# Altium PCB HW_ADHERENT_LANECTRL_R1.PcbDoc (part 1 of 2)
Units mm, origin at the board's own origin, x right, y up, seen from the top; angles counter-clockwise.
Board outline 504 x 60 mm, 4 copper layers (Top Layer, Int1 (GND), Int2 (PWR), Bottom Layer), stack 1.541 mm thick; 223 components, 129 nets, 646 pads, 0 vias.
Unrouted connection lines stored in the file: 353.
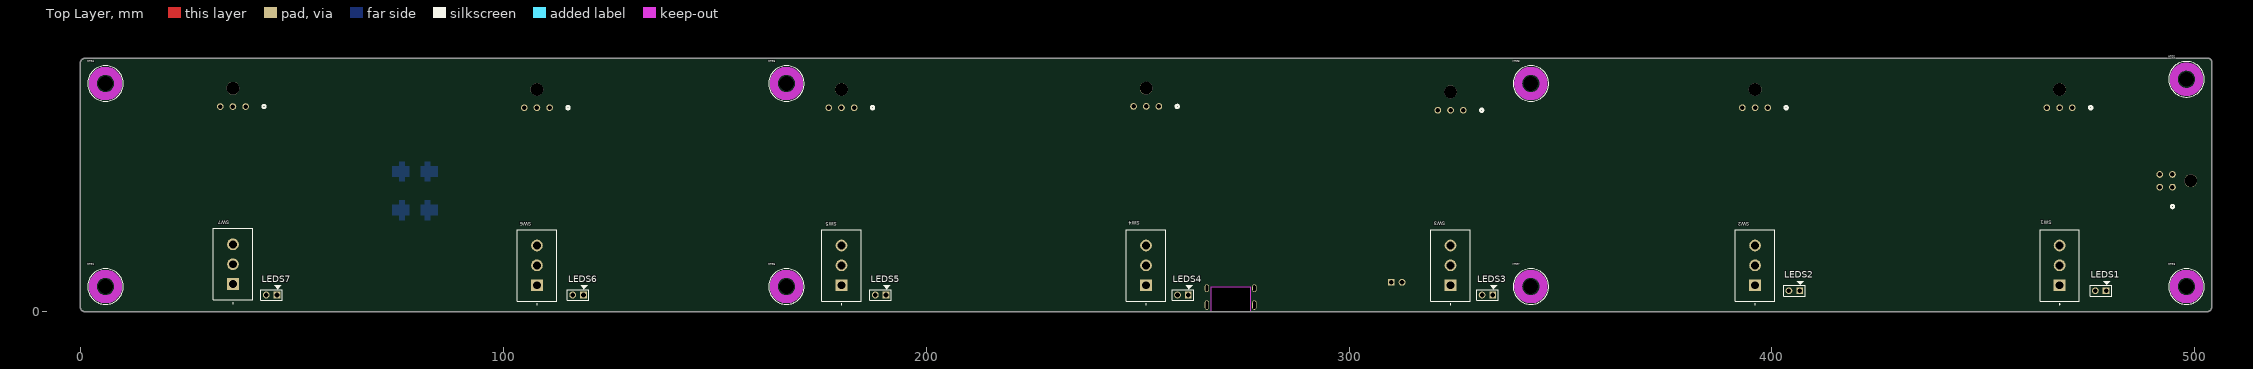
[diagram p0: Top Layer view]
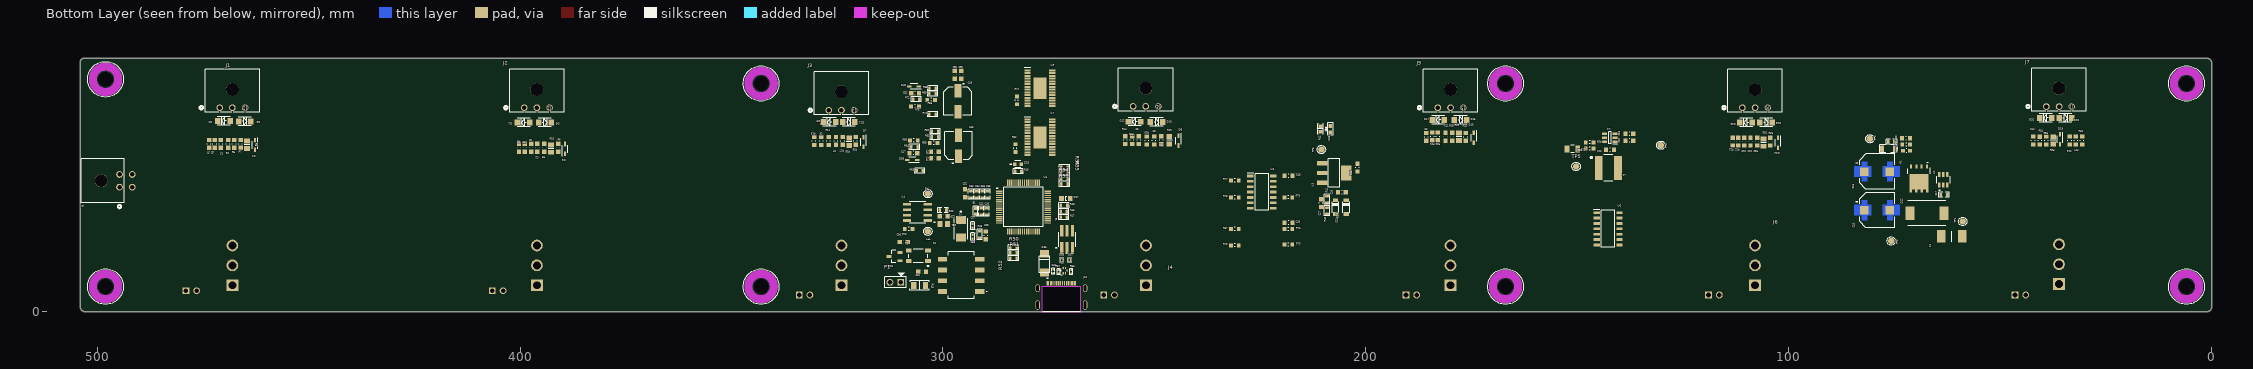
[diagram p1: Bottom Layer view, seen from below]

## Layer stack, top to bottom
Top Solder: solder mask 0.0254, SM-001, Dk 4
Top Layer: signal copper 0.035
Dielectric 1: prepreg 0.1855, PP-023, Dk 4.74
Int1 (GND): signal copper 0.035
Dielectric 2: core 1.03, Core-039, Dk 4.6
Int2 (PWR): signal copper 0.035
Dielectric 3: prepreg 0.1855, PP-023, Dk 4.74
Bottom Layer: signal copper 0.035
Bottom Solder: solder mask 0.0254, SM-001, Dk 4

## Board outline
0,1.27 0,58.73 cw(c1.27,58.73) 1.27,60 503,60 cw(c503,59) 504,59 504,1.27 cw(c502.73,1.27) 502.73,0 1.27,0 cw(c1.27,1.27)

## Design rules (kind name [scope] priority, off if disabled: settings)
Clearance Clearance_1 [InNetClass('All Nets') vs InNet('USB_N')] p1: gap=0.102 ignorepadtopadclearanceinfootprint=FALSE except(0.203: SMDPad-Poly; 0.305: Arc-Poly Track-Poly Fill-Poly; 0.406: Via-Poly Poly-Poly; 0.508: THPad-Poly)
Clearance Clearance_2 [InNetClass('All Nets') vs InNet('USB_P')] p2: gap=0.102 ignorepadtopadclearanceinfootprint=FALSE except(0.203: SMDPad-Poly; 0.305: Arc-Poly Track-Poly Fill-Poly; 0.406: Via-Poly Poly-Poly; 0.508: THPad-Poly)
Clearance [All] p3: gap=0.152 ignorepadtopadclearanceinfootprint=FALSE except(0.305: Arc-Poly Track-Poly SMDPad-Poly THPad-Poly Via-Poly Fill-Poly Poly-Poly)
DiffPairsRouting DiffPairsRouting_120_IC [InDifferentialPairClass('ZDIFF120_CAN_IC')] p1: maxlimit=0.197 minlimit=0.127 mostfreqgap=0.197 toplayer_mingap=0.197 toplayer_minwidth=0.102 toplayer_maxwidth=0.102 toplayer_prefwidth=0.102 midlayer1_maxgap=0.127 midlayer1_prefgap=0.127 midlayer1_minwidth=0.021 midlayer1_maxwidth=0.021 midlayer1_prefwidth=0.021 midlayer2_maxgap=0.127 midlayer2_prefgap=0.127 midlayer2_minwidth=0.021 midlayer2_maxwidth=0.021 midlayer2_prefwidth=0.021 bottomlayer_mingap=0.197 bottomlayer_minwidth=0.102 bottomlayer_maxwidth=0.102 bottomlayer_prefwidth=0.102 impedanceprofiledriven=TRUE impedanceprofileid={950346DA-8157-4DE4-B5BE-C98A694D4EB3} impedanceprofilevalue=120.000000 maxuncoupledlength=12.7
DiffPairsRouting DiffPair_120DiffPairsRouting [InDifferentialPairClass('ZDIFF120')] p2: maxlimit=0.197 minlimit=0.127 mostfreqgap=0.197 toplayer_mingap=0.197 toplayer_minwidth=0.102 toplayer_maxwidth=0.102 toplayer_prefwidth=0.102 midlayer1_maxgap=0.127 midlayer1_prefgap=0.127 midlayer1_minwidth=0.021 midlayer1_maxwidth=0.021 midlayer1_prefwidth=0.021 midlayer2_maxgap=0.127 midlayer2_prefgap=0.127 midlayer2_minwidth=0.021 midlayer2_maxwidth=0.021 midlayer2_prefwidth=0.021 bottomlayer_mingap=0.197 bottomlayer_minwidth=0.102 bottomlayer_maxwidth=0.102 bottomlayer_prefwidth=0.102 impedanceprofiledriven=TRUE impedanceprofileid={950346DA-8157-4DE4-B5BE-C98A694D4EB3} impedanceprofilevalue=120.000000 maxuncoupledlength=12.7
DiffPairsRouting DiffPair_90DiffPairsRouting [InDifferentialPair ('USB')] p3: maxlimit=0.127 minlimit=0.127 mostfreqgap=0.127 toplayer_minwidth=0.174 toplayer_maxwidth=0.174 toplayer_prefwidth=0.174 midlayer1_minwidth=0.093 midlayer1_maxwidth=0.093 midlayer1_prefwidth=0.093 midlayer2_minwidth=0.093 midlayer2_maxwidth=0.093 midlayer2_prefwidth=0.093 bottomlayer_minwidth=0.174 bottomlayer_maxwidth=0.174 bottomlayer_prefwidth=0.174 impedanceprofiledriven=TRUE impedanceprofileid={EB6B380A-3E35-4B21-9C12-EB0546EFA6A0} impedanceprofilevalue=90.000000 maxuncoupledlength=12.7
DiffPairsRouting [All] p4: maxlimit=0.254 minlimit=0.254 mostfreqgap=0.254 toplayer_minwidth=0.381 toplayer_maxwidth=0.381 toplayer_prefwidth=0.381 midlayer1_minwidth=0.381 midlayer1_maxwidth=0.381 midlayer1_prefwidth=0.381 midlayer2_minwidth=0.381 midlayer2_maxwidth=0.381 midlayer2_prefwidth=0.381 bottomlayer_minwidth=0.381 bottomlayer_maxwidth=0.381 bottomlayer_prefwidth=0.381 maxuncoupledlength=12.7
HoleSize [All] p1: absolutevalues=TRUE maxlimit=4 minlimit=0.025 maxpercent=80.000 minpercent=20.000
MatchedLengths DiffPair_120MatchedLengths [InDifferentialPairClass('ZDIFF120')] p1: tolerance=25.4 checknetsindiffpair=FALSE checkdiffpairvsdiffpair=TRUE checkxsignals=TRUE checkothers=TRUE
MatchedLengths DiffPair_90MatchedLengths [InDifferentialPair ('USB')] p2: tolerance=25.4 checknetsindiffpair=FALSE checkdiffpairvsdiffpair=TRUE checkxsignals=TRUE checkothers=TRUE
MinimumSolderMaskSliver [All] p1: minsoldermaskwidth=0
PolygonConnect [All] p1: connectstyle=Direct reliefconductorwidth=0.254 reliefentries=4 polygonreliefangle="90 Angle" airgapwidth=0.254
RoutingVias [All] p1: holewidth=0.61 width=1.219 viastyle="Through Hole" minholewidth=0.203 minwidth=0.406 maxholewidth=0.61 maxwidth=1.219
SilkToSilkClearance [All] p1: silktosilkclearance=0
SilkToSolderMaskClearance [IsPad] p1: minsilkscreentomaskgap=0 clearancetoexposedcopper=TRUE
SolderMaskExpansion [All] p1: expansion=0.102 istentingtop=FALSE
UnRoutedNet [All] p1: checkbadconnections=TRUE
Width [All] p1: maxlimit=1.016 minlimit=0.152 preferedwidth=0.254 minimp=50.000000 maximp=50.000000 favimp=50.000000
24 further rules are at their usual default settings.

## Classes and differential pairs
differential pair class DIFF_USB: USB
net class USB: USB_N USB_P
net class CAN: CAN_N CAN_P
component class 08_DRIVER: C43 C44 C45 C46 C47 C48 C49 C50 C51 C52 D39 D40 R59 R60 R61 R62 R63 R64 R65 R66 R67 R68 R69 R70 R71 R72 R73 R74 R75 R76 R77 R78 R79 U6 U7 U8 U9
component class 07_USB: C42 D36 D37 D38 J10 L2 R57 R58
component class 05_MCU: B1 C32 C33 C34 C35 C36 C37 C38 C39 C40 C41 D27 D28 J9 LEDS1 LEDS2 LEDS3 LEDS4 LEDS5 LEDS6 LEDS7 MTG1 MTG2 MTG3 MTG4 MTG5 MTG6 MTG7 MTG8 R45 R46 R47 R48 R49 R50 R51 R52 R53 R54 R55 R56 S1 U5 Y1
component class 04_POWER: C15 C16 C17 C18 C19 C20 C21 C22 C23 C24 C25 C26 C27 D22 D23 D24 D25 F1 L1 M1 R36 R37 R38 R39 R40 R41 R42 TP1 TP2 TP3 TP4 TP5 TP6 U1 U2 U3
component class 03_CONNECTOR: C1 C2 C3 C4 C5 C6 C7 C8 C9 C10 C11 C12 C13 C14 D1 D2 D3 D4 D5 D6 D7 D8 D9 D10 D11 D12 D13 D14 D15 D16 D17 D18 D19 D20 D21 J1 J2 J3 J4 J5 J6 J7 J8 R1 R2 R3 R4 R5 R6 R7 R8 R9 R10 R11 R12 R13 R14 R15 R16 R17 R18 R19 R20 R21 R22 R23 R24 R25 R26 R27 R28 R29 R30 R31 R32 R33 R34 R35 SW1 SW2 SW3 SW4 SW5 SW6 SW7
component class 06_CANBUS: C28 C29 C30 C31 D26 FB1 P1 R43 R44 T1 TP7 TP8 U4
differential pair USB: +USB_P -USB_N

## Components (designator, comment, footprint, x,y, rotation, side; value= is the part's Value field where it differs from the comment)
B1 "BEAD FERRITE 120R 1LN SMD 0603" F0603 292.329,23.812 r90 bottom value=120R
C1 "100nF" CAP0603 470.722,39.747 r90 bottom
C2 "100nF" CAP0603 397.387,38.805 r90 bottom
C3 "100nF" CAP0603 469.019,39.747 r90 bottom
C4 "100nF" CAP0603 395.882,38.805 r90 bottom
C5 "100nF" CAP0603 328.751,40.4 r90 bottom
C6 "100nF" CAP0603 253.682,40.6 r270 bottom
C7 "100nF" CAP0603 325.296,40.454 r90 bottom
C8 "100nF" CAP0603 250.082,40.525 r270 bottom
C9 "100nF" CAP0603 185.7,41.4 r90 bottom
C10 "100nF" CAP0603 110.57,40.238 r90 bottom
C11 "100nF" CAP0603 181.19,41.413 r270 bottom
C12 "100nF" CAP0603 109.076,40.238 r270 bottom
C13 "100nF" CAP0603 33.602,40.532 r270 bottom
C14 "100nF" CAP0603 42.222,40.532 r270 bottom
C15 "220uF 50V" CAP_EEEFT1H221AV 79.154,24.047 r180 bottom
C16 "220uF 50V" CAP_EEEFT1H221AV 79.154,33.187 r180 bottom
C17 "CAP CER 0.22UF 50V X7R 0603" SMC0603 63.324,27.727 r180 bottom value="0.22uF 50V"
C18 "CAP CER 10UF 50V X5R 1206" SMC1206 76.464,38.557 r0 bottom value="10uF 50V"
C19 "CAP CER 0.1UF 50V X7R 0603" SMC0603 75.784,40.277 r0 bottom value="0.1uF 50V"
C20 "100nF 25V" CAP0603 72.314,41.027 r0 bottom value=100nF
C21 "0.1uF 16V" CAP0603 142.3,38.3 r0 bottom
C22 "1uF" CAP0603 137.7,40.5 r180 bottom
C23 "0.1uF 100V" CAP0603 137.7,42.1 r180 bottom
C24 "22uF 35V" CAP1206 151.2,38.5 r0 bottom
C25 "10uF" CAP0603 201.99,34.1 r270 bottom
C26 "10uF" CAP0603 205.68,28.27 r0 bottom
C27 "100nF 25V" CAP0603 210.59,25.71 r270 bottom value=100nF
C28 "CAP CER 10UF 10V X5R 0603" SMC0603 299.999,24.082 r0 bottom value="10uF 10V"
C29 "100nF" CAP0603 299.812,22.622 r0 bottom
C30 "CAP CER 100PF 50V C0G/NP0 0603" CAP0603 309.279,16.522 r0 bottom value="100pF 50V"
C31 "CAP CER 100PF 50V C0G/NP0 0603" CAP0603 304.909,9.482 r0 bottom value="100pF 50V"
C32 "4.7uF" CAP0603 294.789,28.059 r270 bottom
C33 "CAP CER 1UF 16V X7R 0603" SMC0603 293.379,27.782 r270 bottom value="1uF 16V"
C34 "CAP CER 1UF 16V X7R 0603" SMC0603 292.049,27.782 r270 bottom value="1uF 16V"
C35 "CAP CER 1UF 16V X7R 0603" SMC0603 290.709,27.782 r270 bottom value="1uF 16V"
C36 "CAP CER 1UF 16V X7R 0603" SMC0603 289.379,27.782 r270 bottom value="1uF 16V"
C37 "8.2pF 25V" 0402_C 292.979,20.342 r90 bottom
C38 "8.2pF 25V" 0402_C 292.979,17.782 r270 bottom
C39 "100nF 25V" CAP0603 289.859,18.112 r90 bottom value=100nF
C40 "CAP CER 1UF 16V X7R 0603" SMC0603 289.639,23.757 r90 bottom value="1uF 16V"
C41 "CAP CER 1UF 16V X7R 0603" SMC0603 290.939,23.757 r90 bottom value="1uF 16V"
C42 "CAP CER 0.1UF 50V X7R 0402" SMC0402 273.9,9.6 r90 bottom value="0.1uF 50V"
C43 "EEH-ZA1H220P" CAP_EEHZA1H220P 296.328,39.304 r90 bottom
C44 "100nF" CAP0603 301.936,36.36 r180 bottom value="100nF 50V"
C45 "100nF" CAP0603 301.936,37.91 r180 bottom value="100nF 50V"
C46 "0.1uF 10V" CAP0603 218.301,21.084 r0 bottom
C47 "100nF 25V" CAP0603 307.004,37.534 r0 bottom value=100nF
C48 "0.1uF 10V" CAP0603 218.301,32.14 r0 bottom
C49 "EEH-ZA1H220P" CAP_EEHZA1H220P 296.468,49.794 r270 bottom
C50 "100nF" CAP0603 295.678,56.064 r270 bottom value="100nF 50V"
C51 "100nF" CAP0603 297.178,56.064 r270 bottom value="100nF 50V"
C52 "100nF 25V" CAP0603 306.583,51.654 r0 bottom value=100nF
D1 "BAT54WS-7-F" SOD2513X120N 462.679,39.472 r270 bottom
D2 "SMF33A" "SOD-123F - duplicate" 470.014,45.153 r180 bottom
D3 "BAT54WS-7-F" SOD2513X120N 389.362,38.53 r90 bottom
D4 "SMF33A" "SOD-123F - duplicate" 399.147,44.774 r180 bottom
D5 "SMF33A" "SOD-123F - duplicate" 465.072,45.06 r0 bottom
D6 "SMF33A" "SOD-123F - duplicate" 394.108,44.774 r0 bottom
D7 "BAT54WS-7-F" SOD2513X120N 318.778,40.179 r270 bottom
D8 "BAT54WS-7-F" SOD2513X120N 244.282,40.5 r270 bottom
D9 "SMF33A" "SOD-123F - duplicate" 326.84,44.855 r180 bottom
D10 "SMF33A" "SOD-123F - duplicate" 249.529,44.89 r0 bottom
D11 "SMF33A" "SOD-123F - duplicate" 322.265,44.855 r0 bottom
D12 "SMF33A" "SOD-123F - duplicate" 254.689,44.96 r180 bottom
D13 "BAT54WS-7-F" SOD2513X120N 174.5,41.2 r270 bottom
D14 "BAT54WS-7-F" SOD2513X120N 102.556,39.963 r270 bottom
D15 "SMF33A" "SOD-123F - duplicate" 177.636,45.322 r0 bottom
D16 "SMF33A" "SOD-123F - duplicate" 110.12,44.771 r180 bottom
D17 "SMF33A" "SOD-123F - duplicate" 182.916,45.392 r180 bottom
D18 "SMF33A" "SOD-123F - duplicate" 105.393,44.771 r0 bottom
D19 "BAT54WS-7-F" SOD2513X120N 35.892,40.807 r270 bottom
D20 "SMF33A" "SOD-123F - duplicate" 39.279,45.854 r180 bottom
D21 "SMF33A" "SOD-123F - duplicate" 34.629,45.821 r0 bottom
D22 "SMDJ24CA" DIONM9059X262N 67.374,23.357 r180 bottom
D23 "MBR0520LT1G" SOD3716X135N 204.66,24.75 r270 bottom
D24 "MBR0520LT1G" SOD3716X135N 207.21,24.75 r270 bottom
D25 "LTST-C191KRKT" LED0603 208.395,43.23 r90 bottom
D26 "CAN" SOT23_3-DIODE 311.459,13.072 r0 bottom value=2Ch
D27 "LED GREEN" LED0805 270.922,26.774 r180 bottom
D28 "LED YELLOW CLEAR SMD" Lite-On_Yellow_0603 282.279,34.912 r180 bottom
D36 "SMAJ5.0A" SMAJ5.0A 275.999,11.512 r90 bottom
D37 "TVS DIODE 7VWM 10VC 0402" Littelfuse_SESD0402_MFG 270.132,12.214 r0 bottom value=RF2945-000
D38 "TVS DIODE 7VWM 10VC 0402" Littelfuse_SESD0402_MFG 271.922,12.214 r180 bottom value=RF2945-000
D39 "BAT54WS-7-F" SOD2513X120N 307.278,35.874 r0 bottom
D40 "BAT54WS-7-F" SOD2513X120N 306.858,53.304 r0 bottom
F1 "0452005.MRL" FUSC6127X294N 61.519,17.877 r0 bottom
FB1 "BLM21PG121SN1D" BEADC2012X105N/ 299.789,20.812 r180 bottom
J1 "436500300" CONN_SD-43650-001_03_MOL/ 468,52.6 r0 bottom locked
J2 "436500300" CONN_SD-43650-001_03_MOL/ 396,52.6 r0 bottom locked
J3 "436500300" CONN_SD-43650-001_03_MOL/ 324,52 r0 bottom locked
J4 "436500300" CONN_SD-43650-001_03_MOL/ 252.051,52.9 r0 bottom locked
J5 "436500300" CONN_SD-43650-001_03_MOL/ 180,52.6 r0 bottom locked
J6 "436500300" CONN_SD-43650-001_03_MOL/ 108,52.6 r0 bottom locked
J7 "436500300" CONN_SD-43650-001_03_MOL/ 36.129,52.87 r0 bottom locked
J8 "0430450400" CONN_SD-43045-001_04_MOL 495.342,31 r270 bottom
J9 "FTSH-103-01-F-DV-TR" SAMTEC_FTSH-103-01-F-DV-TR 270.642,17.169 r180 bottom
J10 "USB C REC 16P 3U\" MID MNT 1.6MM" GCT_USB4510-03-1-A_REVA 272,0 r180 bottom
L1 "18uH" WE-LQS_6045 142.7,34 r0 bottom
L2 "CMC 100MA 2LN 90 OHM SMD" IND_MCZ1210AH_TDK 271.322,9.764 r90 bottom
LEDS1 "0022032021" "THD 1x2p. male straight" 479,5 r180 top
LEDS2 "0022032021" "THD 1x2p. male straight" 406.54,5 r180 top
LEDS3 "0022032021" "THD 1x2p. male straight" 334,4 r180 top
LEDS4 "0022032021" "THD 1x2p. male straight" 262,4 r180 top
LEDS5 "0022032021" "THD 1x2p. male straight" 190.54,4 r180 top
LEDS6 "0022032021" "THD 1x2p. male straight" 119,4 r180 top
LEDS7 "0022032021" "THD 1x2p. male straight" 46.54,4 r180 top
M1 "BSC028N06NS" BSC028N06NS 69.244,31.484 r0 bottom
MTG1 "Mounting Hole, 3 MM" "M3 Mounting Hole" 6,6 r0 top
MTG2 "Mounting Hole, 3 MM" "M3 Mounting Hole" 498,55 r0 top
MTG3 "Mounting Hole, 3 MM" "M3 Mounting Hole" 498,6 r0 top
MTG4 "Mounting Hole, 3 MM" "M3 Mounting Hole" 6,54 r0 top
MTG5 "Mounting Hole, 3 MM" "M3 Mounting Hole" 167,6 r0 top
MTG6 "Mounting Hole, 3 MM" "M3 Mounting Hole" 167,54 r0 top
MTG7 "Mounting Hole, 3 MM" "M3 Mounting Hole" 343,6 r0 top
MTG8 "Mounting Hole, 3 MM" "M3 Mounting Hole" 343,54 r0 top
P1 "0022032021" "THD 1x2p. male straight" 310,7 r0 bottom
R1 "10k %1" RESIS_0603 472.172,39.747 r90 bottom
R2 "10k %1" RESIS_0603 398.837,38.805 r90 bottom
R3 "10k %1" RESIS_0603 473.502,39.747 r270 bottom
R4 "10k %1" RESIS_0603 400.237,38.805 r270 bottom
R5 "100k %1" RESIS_0603 467.559,39.747 r90 bottom
R6 "100k %1" RESIS_0603 390.982,38.805 r270 bottom
R7 "15k" RESIS_0603 466.049,39.747 r90 bottom
R8 "10k" RES0805 464.529,39.548 r90 bottom
R9 "15k" RESIS_0603 394.252,38.805 r90 bottom
R10 "10k" RES0805 392.652,38.607 r90 bottom
R11 "10k %1" RESIS_0603 327.051,40.4 r270 bottom
R12 "10k %1" RESIS_0603 255.282,40.6 r90 bottom
R13 "10k %1" RESIS_0603 330.451,40.4 r270 bottom
R14 "10k %1" RESIS_0603 256.882,40.6 r270 bottom
R15 "100k %1" RESIS_0603 320.666,40.454 r90 bottom
R16 "100k %1" RESIS_0603 248.382,40.6 r90 bottom
R17 "15k" RESIS_0603 323.706,40.454 r90 bottom
R18 "10k" RES0805 322.176,40.255 r270 bottom
R19 "10k" RES0805 246.482,40.6 r90 bottom
R20 "15k" RESIS_0603 251.782,40.525 r270 bottom
R21 "10k %1" RESIS_0603 184.302,41.513 r270 bottom
R22 "10k %1" RESIS_0603 112,40.238 r90 bottom
R23 "10k %1" RESIS_0603 183.002,41.513 r90 bottom
R24 "10k %1" RESIS_0603 113.32,40.238 r270 bottom
R25 "100k %1" RESIS_0603 176.4,41.4 r90 bottom
R26 "100k %1" RESIS_0603 104.386,40.238 r90 bottom
R27 "10k %1" RESIS_0603 32.142,40.532 r270 bottom
R28 "15k" RESIS_0603 179.63,41.413 r270 bottom
R29 "10k" RES0805 178,41.4 r270 bottom
R30 "15k" RESIS_0603 107.526,40.238 r270 bottom
R31 "10k" RES0805 106.006,40.039 r270 bottom
R32 "10k %1" RESIS_0603 30.672,40.532 r270 bottom
R33 "100k %1" RESIS_0603 39.132,40.532 r90 bottom
R34 "15k" RESIS_0603 40.672,40.482 r270 bottom
R35 "10k" RES0805 37.522,40.532 r270 bottom
R36 "RC0603FR-07100KL" FP-RC0603-0_55-MFG 72.204,38.127 r180 bottom
R37 "RES 10K OHM 1% 1/8W 0603" RES0603 72.284,39.547 r0 bottom value=10k
R38 "88.7k" RES0603 147.1,38.6 r180 bottom
R39 "22.1k" RES0603 147.1,40.1 r0 bottom
R40 "RES 22K OHM 1% 1/10W 0603" SMR0603 209.2,23.9 r270 bottom value=22k
R41 "RES 33K OHM 1% 1/10W 0603" SMR0603 209.2,26.6 r270 bottom value=33K
R42 "330 Ohms" "RES 0603_1608" 210.75,43.27 r270 bottom
R43 "120 Ohms" "RES 1206_3216" 305.509,6.272 r180 bottom
R44 "RES 10K OHM 1% 1/8W 0603" RES0603 308.099,19.612 r180 bottom value=10k
R45 "RES 10K OHM 1% 1/10W 0603" SMR0603 271.432,23.734 r180 bottom value=10k
R46 "RES 10K OHM 1% 1/10W 0603" SMR0603 291.319,18.302 r270 bottom value=10k
R47 "RES 10K OHM 1% 1/10W 0603" SMR0603 271.432,22.424 r0 bottom value=10k
R48 "1K" "R 0603(1608)" 271.392,25.164 r180 bottom
R49 "1K" "R 0603(1608)" 282.209,33.222 r180 bottom
R50 "RES 100 OHM 1% 1/10W 0603" SMR0603 283.309,15.32 r0 bottom value=100R
R51 "RES 100 OHM 1% 1/10W 0603" SMR0603 283.309,13.981 r0 bottom value=100R
R52 "RES 100 OHM 1% 1/10W 0603" SMR0603 283.309,12.652 r0 bottom value=100R
R53 "RES 100 OHM 1% 1/10W 0603" SMR0603 271.277,30.233 r180 bottom value=100R
R54 "RES 100 OHM 1% 1/10W 0603" SMR0603 271.277,31.546 r180 bottom value=100R
R55 "RES 100 OHM 1% 1/10W 0603" SMR0603 271.277,32.859 r180 bottom value=100R
R56 "RES 100 OHM 1% 1/10W 0603" SMR0603 271.277,34.173 r180 bottom value=100R
R57 "RES SMD 5.1K OHM 1% 1/16W 0402" SMR0402 272.612,9.504 r90 bottom value="5.1k %1"
R58 "RES SMD 5.1K OHM 1% 1/16W 0402" SMR0402 269.642,9.504 r90 bottom value="5.1k %1"
R59 "RES 10K OHM 1% 1/8W 0603" RES0603 302.183,39.914 r180 bottom value=10k
R60 "4K7" "R 0603(1608)" 301.858,42.694 r0 bottom
R61 "4K7" "R 0603(1608)" 301.858,41.344 r0 bottom
R62 "1.2kΩ" RES0603 282.899,38.712 r90 bottom
R63 "4K7" "R 0603(1608)" 305.508,33.414 r0 bottom
R64 "4K7" "R 0603(1608)" 306.727,38.994 r180 bottom
R65 "604Ω" RES0603 306.899,40.512 r0 bottom
R66 "RES 10K OHM 1% 1/8W 0603" RES0603 302.798,50.154 r180 bottom value=10k
R67 "RES 10K OHM 1% 1/8W 0603" RES0603 231.011,19.584 r180 bottom value=10k
R68 "4K7" "R 0603(1608)" 302.458,52.914 r0 bottom
R69 "4K7" "R 0603(1608)" 302.458,51.604 r0 bottom
R70 "RES 10K OHM 1% 1/8W 0603" RES0603 231.011,15.724 r180 bottom value=10k
R71 "1.2kΩ" RES0603 282.539,50.002 r90 bottom
R72 "4K7" "R 0603(1608)" 306.307,50.244 r180 bottom
R73 "RES 10K OHM 1% 1/8W 0603" RES0603 218.351,15.894 r0 bottom value=10k
R74 "4K7" "R 0603(1608)" 302.448,46.704 r0 bottom
R75 "604Ω" RES0603 306.599,48.612 r0 bottom
R76 "RES 10K OHM 1% 1/8W 0603" RES0603 218.351,19.554 r0 bottom value=10k
R77 "RES 10K OHM 1% 1/8W 0603" RES0603 231.011,31.08 r180 bottom value=10k
R78 "RES 10K OHM 1% 1/8W 0603" RES0603 231.011,27.06 r180 bottom value=10k
R79 "RES 10K OHM 1% 1/8W 0603" RES0603 218.351,27.08 r0 bottom value=10k
S1 "418121270804" 418121270804 295.699,8.642 r90 bottom
SW1 "300SP1J1BLKM2RE" sw_300SP1J1BLKM2RE_ 468,11 r90 top
SW2 "300SP1J1BLKM2RE" sw_300SP1J1BLKM2RE_ 396,11 r90 top
SW3 "300SP1J1BLKM2RE" sw_300SP1J1BLKM2RE_ 324,11 r90 top
SW4 "300SP1J1BLKM2RE" sw_300SP1J1BLKM2RE_ 252,11 r90 top
SW5 "300SP1J1BLKM2RE" sw_300SP1J1BLKM2RE_ 180,11 r90 top
SW6 "300SP1J1BLKM2RE" sw_300SP1J1BLKM2RE_ 108,11 r90 top
SW7 "300SP1J1BLKM2RE" sw_300SP1J1BLKM2RE_ 36.129,11.27 r90 top locked
T1 "ACT45B-510-2P" TDK_ACT45B-510-2P-TL003_0 305.824,13.262 r0 bottom
TP1 "Testpoint" SMD_Ø1.5mm 58.905,21.383 r90 bottom
TP2 "Testpoint" SMD_Ø1.5mm 80.861,40.927 r90 bottom
TP3 "Testpoint" SMD_Ø1.5mm 75.81,16.773 r90 bottom
TP4 "Testpoint" SMD_Ø1.5mm 130.3,39.4 r90 bottom
TP5 "Testpoint" SMD_Ø1.5mm 150.3,34.4 r180 bottom
TP6 "Testpoint" SMD_Ø1.5mm 210.54,38.38 r90 bottom
TP7 "Testpoint" SMD_Ø1.5mm 303.579,19.042 r0 bottom
TP8 "Testpoint" SMD_Ø1.5mm 303.579,27.942 r0 bottom
U1 "LM74700QDBVRQ1" SOT95P280X145-6N/LM74700QDBVRQ1 63.464,31.267 r90 bottom
U2 "LMR50410XDBVR" SOT95P280X145-6N/ 142.3,41.2 r0 bottom
U3 "AMS1117-3.3" SOT-223-4_L6.5-W3.5-P2.30-LS7.0-BR 207.51,32.85 r0 bottom
U4 "SN65HVD231QDR" SOIC127P599X175-8N/ 306.039,23.512 r0 bottom
U5 "STM32G0B1RET6" QFP50P1200X1200X160-64N 280.959,24.772 r180 bottom
U6 "SN74HCS08DR" SOIC127P600X175-14N 142.762,19.65 r180 bottom
U7 "TPS4H160BQPWPRQ1" SOP65P640X120-29N 277.099,41.312 r180 bottom
U8 "SN74HCS08DR" SOIC127P600X175-14N 224.59,28.34 r180 bottom
U9 "TPS4H160BQPWPRQ1" SOP65P640X120-29N 277.099,52.919 r180 bottom
Y1 "ECS-80-8-30Q-VS-TR" XTAL_ECS-80-8-30Q-VS-TR 295.759,19.662 r270 bottom

## Footprints (in the part's own frame and the unit in brackets; to place one, negate y for a bottom-side part, rotate by r counter-clockwise, add the part's x,y. Pads: shape width x height; smd on the part's side, far side on the other; paste and mask are expansions set on the pad)
0402_C [mil] "MODIFIED BY DN_MH - 16JAN17; CHECKED BY DN_TN - 18JAN17"
  rect 22x20 smd mask+2.5: 1(-19,0) 2(19,0)
  silkscreen extent -38,-18 38,18, body extent -20,-10 20,10, height 15
418121270804 [mm]
  rect 1.1x2.2 smd: 1(-3.81,-4.4) 2(-1.27,-4.4) 3(1.27,-4.4) 4(3.81,-4.4) 5(3.81,4.4) 6(1.27,4.4) 7(-1.27,4.4) 8(-3.81,4.4)
  silkscreen extent -5.55,-6.1 5.55,3.1, body extent -5.55,-4.9 5.55,4.9, height 4.32
BEADC2012X105N/ [mm]
  rect 1.14x1.47 smd: 1(-0.89,0) 2(0.89,0)
  body extent -1,-0.63 1,0.63, height 1.05
BSC028N06NS [mm]
  rect 0.6x0.8 smd: D(-1.905,2.895) D(-0.635,2.895) D(0.635,2.895) D(1.905,2.895)
  rect 4.41x3.655 smd: D(0,0.667)
  rect 0.5x0.925 smd: G(1.905,-2.895) S(-1.905,-2.895) S(-0.635,-2.895) S(0.635,-2.895)
  silkscreen extent -2.66,-3.9 2.66,-1.2, body extent -2.64,-3.06 2.64,3.06, height 1.1
CAP0603 [mm] "CAPACITOR 0603"
  rect 1x1.05 smd: 1(-0.925,0) 2(0.925,0)
  silkscreen extent -0.05,-0.43 0.05,0.43, body extent -0.8,-0.4 0.8,0.4, height 0.8
CAP1206 [mm]
  rect 1.105x1.658 smd paste+0 mask+0: 1(-1.276,0) 2(1.276,0)
  silkscreen extent -0.42,-0.88 0.42,0.88, body extent -1.6,-0.8 1.6,0.8, height 1.4
CAP_EEEFT1H221AV [mm]
  rect 2x2 smd paste-2 mask+0: 1(-3,0) 2(3,0)
  Top Layer region: -2.35,1.25 -1.35,1.25 -1.35,-1.25 -2.35,-1.25 -2.35,-2.35 -3.65,-2.35 -3.65,-1.25 -5.35,-1.25 -5.35,1.25 -3.65,1.25 -3.65,2.35 -2.35,2.35
  Top Layer region: 3.65,1.25 5.35,1.25 5.35,-1.25 3.65,-1.25 3.65,-2.35 2.35,-2.35 2.35,-1.25 1.35,-1.25 1.35,1.25 2.35,1.25 2.35,2.35 3.65,2.35
  silkscreen extent -4.9,-4.15 4.15,4.15, body extent -4.85,-4.15 4.85,4.15, height 10.5
CAP_EEHZA1H220P [mm]
  rect 3.2x1.6 smd: 1(-2.5,0) 2(2.5,0)
  silkscreen extent -4.25,-3.3 3.3,3.3, body extent -3.65,-3.3 3.65,3.3, height 5.8
CONN_SD-43045-001_04_MOL [mil]
  round 62 hole 42 mask+4.02: 1(59,26) 2(-59,26) 3(59,144) 4(-59,144)
  round 120 hole 120 unplated mask+0: ""(0,-144)
  silkscreen extent -205,-330 255,70, body extent -201,-326 199,156, height 345
CONN_SD-43650-001_03_MOL/ [mil]
  round 62 hole 42 paste-99999 mask+0: 1(118.11,170.08) 2(0,170.08) 3(-118.11,170.08)
  round 120 hole 120 unplated paste-99999 mask+0: 4(0,0)
  silkscreen extent -254,-186 304,214, body extent -250,-182 248,208, height 219
DIONM9059X262N [mm]
  rect 2.15x3.15 smd: 1(-4,0) 2(4,0)
  silkscreen extent -4.5,-2.95 4.5,2.95, body extent -4.5,-2.95 4.5,2.95, height 2.62
F0603 [mil] "WE-CBF SMD EMI Suppression Ferrite Bead"
  rect 30x30 smd: 1(-27.5,0) 2(27.5,0)
  silkscreen extent -48,-21 48,21, body extent -35,-15 35,15, height 31
FP-RC0603-0_55-MFG [mm]
  rect 0.9x0.8 smd paste+0 mask+0: 1(-0.85,0) 2(0.85,0)
  silkscreen extent -0.03,-0.45 0.03,0.45, body extent -0.8,-0.4 0.8,0.4, height 0.55
FUSC6127X294N [mm]
  rect 2.02x2.95 smd: 1(-2.5,0) 2(2.5,0)
  silkscreen extent 0,-1.24 0,1.24, body extent -3.09,-1.33 3.01,1.36, height 2.7
GCT_USB4510-03-1-A_REVA [mm]
  rect 0.6x1.1 smd: A1_B12(-3.2,6.75) A4_B9(-2.4,6.75) B1_A12(3.2,6.75) B4_A9(2.4,6.75)
  rect 0.3x1.1 smd: A5(-1.25,6.75) A6(-0.25,6.75) A7(0.25,6.75) A8(1.25,6.75) B5(1.75,6.75) B6(0.75,6.75) B7(-0.75,6.75) B8(-1.75,6.75)
  oval 1x2.2 hole 0.6 slot 1.8 at 90 deg: S1(-5.62,1.6) S4(5.62,1.6)
  oval 1x1.8 hole 0.6 slot 1.4 at 90 deg: S2(5.62,5.6) S3(-5.62,5.6)
  Keep-Out Layer board cut-out: -4.62,0 4.62,0 4.62,5.965 -4.62,5.965
  silkscreen extent -4.47,0 4.47,8.05, body extent -5.74,-0.53 5.8,6.67, height 1.56
IND_MCZ1210AH_TDK [mil]
  rect 20x12 smd paste-6 mask+0: 1(-24.11,10.83) 2(-24.11,-10.83) 3(24.11,-10.83) 4(24.11,10.83)
  silkscreen extent -42,-28 7,29, body extent -27,-23 27,23, height 24
LED0603 [mil] "LED0603"
  rect 36x32 smd: 1(-29.5,0) 2(29.5,0)
  silkscreen extent -58,-26 58,51, body extent -32,-16 32,16, height 43
LED0805 [mm]
  rect 1.1x1.2 smd: 1(-1.05,0) 2(1.05,0)
  silkscreen extent -0.15,-0.5 0.15,0.5, body extent -1,-0.63 1,0.63, height 0.68
Lite-On_Yellow_0603 [mm]
  rect 0.8x0.8 smd paste+0 mask+0: 1(-0.75,0) 2(0.75,0)
  silkscreen extent -1.83,-0.8 0.7,0.8, body extent -0.8,-0.4 0.8,0.4, height 0.65
Littelfuse_SESD0402_MFG [mm]
  rect 0.35x0.6 smd paste+0 mask+0: 1(-0.325,0) 2(0.325,0)
  silkscreen extent -0.54,-0.51 0.51,0.51, body extent -0.5,-0.3 0.5,0.3, height 0.43
"M3 Mounting Hole" [mm]
  round 0 hole 3.45 unplated mask+0: 0(0,0)
  Keep-Out Layer circle w1.9: c0,0 r3
  silkscreen extent -4.2,-4.2 4.2,4.2
QFP50P1200X1200X160-64N [mm]
  rect 1.475x0.3 smd: 1(-5.738,3.75) 2(-5.738,3.25) 3(-5.738,2.75) 4(-5.738,2.25) 5(-5.738,1.75) 6(-5.738,1.25) 7(-5.738,0.75) 8(-5.738,0.25) 9(-5.738,-0.25) 10(-5.738,-0.75) 11(-5.738,-1.25) 12(-5.738,-1.75) 13(-5.738,-2.25) 14(-5.738,-2.75) 15(-5.738,-3.25) 16(-5.738,-3.75) 33(5.738,-3.75) 34(5.738,-3.25) 35(5.738,-2.75) 36(5.738,-2.25) 37(5.738,-1.75) 38(5.738,-1.25) 39(5.738,-0.75) 40(5.738,-0.25) 41(5.738,0.25) 42(5.738,0.75) 43(5.738,1.25) 44(5.738,1.75) 45(5.738,2.25) 46(5.738,2.75) 47(5.738,3.25) 48(5.738,3.75)
  rect 0.3x1.475 smd: 17(-3.75,-5.738) 18(-3.25,-5.738) 19(-2.75,-5.738) 20(-2.25,-5.738) 21(-1.75,-5.738) 22(-1.25,-5.738) 23(-0.75,-5.738) 24(-0.25,-5.738) 25(0.25,-5.738) 26(0.75,-5.738) 27(1.25,-5.738) 28(1.75,-5.738) 29(2.25,-5.738) 30(2.75,-5.738) 31(3.25,-5.738) 32(3.75,-5.738) 49(3.75,5.738) 50(3.25,5.738) 51(2.75,5.738) 52(2.25,5.738) 53(1.75,5.738) 54(1.25,5.738) 55(0.75,5.738) 56(0.25,5.738) 57(-0.25,5.738) 58(-0.75,5.738) 59(-1.25,5.738) 60(-1.75,5.738) 61(-2.25,5.738) 62(-2.75,5.738) 63(-3.25,5.738) 64(-3.75,5.738)
  silkscreen extent -6.35,-4.65 4.65,4.65, body extent -6,-6 6,6, height 1.6
"R 0603(1608)" [mm]
  rrect50% 0.6x0.85 smd: 1(-0.75,0) 2(0.75,0)
  silkscreen extent -1.2,-0.6 1.2,0.6, body extent -0.8,-0.4 0.8,0.4, height 0.45
RES0603 [mm]
  rect 0.9x0.95 smd: 1(-0.925,0) 2(0.925,0)
  silkscreen extent -0.1,-0.38 0.1,0.38, body extent -0.8,-0.4 0.8,0.4, height 0.5
RES0805 [mm]
  rect 1.15x1.35 smd: 1(-0.875,0) 2(0.875,0)
  silkscreen extent 0,-0.64 0,0.64, body extent -1,-0.62 1,0.63, height 0.6
"RES 0603_1608" [mm] "Chip Resistor, 2-Leads, Body 1.60x0.80mm, IPC Medium Density"
  rect 0.85x0.95 smd: 1(-0.65,0) 2(0.65,0)
  silkscreen extent -1.27,-0.7 1.27,0.7, body extent -0.8,-0.4 0.8,0.4, height 0.45
"RES 1206_3216" [mm] "Chip Resistor, 2-Leads, Body 3.13x1.55mm, IPC Medium Density"
  rect 1.2x1.65 smd: 1(-1.4,0) 2(1.4,0)
  silkscreen extent -2.3,-1.1 2.3,1.1, body extent -1.6,-0.8 1.6,0.8, height 0.6
RESIS_0603 [mm]
  rect 1x1.05 smd: 1(-0.925,0) 2(0.925,0)
  silkscreen extent -0.05,-0.43 0.05,0.43, body extent -0.82,-0.4 0.82,0.4, height 0.5
SAMTEC_FTSH-103-01-F-DV-TR [mm]
  rect 0.74x2.79 smd: 01(-1.27,-2.035) 02(-1.27,2.035) 03(0,-2.035) 04(0,2.035) 05(1.27,-2.035) 06(1.27,2.035)
  silkscreen extent -2.66,-2.13 1.99,1.72, body extent -1.91,-2.92 1.91,2.92, height 5.96
SMAJ5.0A [mm]
  rect 1.8x2.1 smd: 1(-2.2,0) 2(2.2,0)
  silkscreen extent -2.2,-1.2 1.7,1.2, body extent -2.62,-1.3 2.42,1.3, height 2.29
SMC0402 [mil]
  rrect15% 18x20 smd mask+1.97: 1(-14.76,0) 2(14.76,0)
  Top Layer pour cut-out: -5.76,10 5.76,10 5.76,-10 -5.76,-10
  silkscreen extent -28,-14 28,14, body extent -20,-10 20,10, height 18
SMC0603 [mm]
  rrect50% 0.6x0.85 smd: 1(-0.75,0) 2(0.75,0)
  silkscreen extent -1.2,-0.6 1.2,0.6, body extent -0.8,-0.4 0.8,0.4, height 0.81
SMC1206 [mm]
  rrect50% 0.9x1.6 smd mask+0.102: 1(-1.5,0) 2(1.5,0)
  silkscreen extent -2.05,-0.95 2.05,0.95, body extent -1.6,-0.8 1.6,0.8, height 1.26
SMD_Ø1.5mm [mm]
  round 1.5 smd paste-5: 1(0,0)
  silkscreen extent -1,-1 1,1
SMR0402 [mil]
  rrect15% 18x20 smd mask+1.97: 1(-14.76,0) 2(14.76,0)
  Top Layer pour cut-out: -5.76,-10 -5.76,9.6 5.76,9.6 5.76,-10
  silkscreen extent -28,-14 28,14, body extent -20,-10 20,10, height 13
SMR0603 [mm]
  rrect50% 0.6x0.85 smd: 1(-0.75,0) 2(0.75,0)
  silkscreen extent -1.2,-0.6 1.2,0.6, body extent -0.8,-0.4 0.8,0.4, height 0.45
SOD2513X120N [mm]
  rect 1.075x0.5 smd: 1(-1.162,0) 2(1.162,0)
  silkscreen extent -1.7,-0.65 0.85,0.65, body extent -1.26,-0.65 1.26,0.65, height 1.1
SOD3716X135N [mm]
  rect 0.91x1.22 smd: A(1.635,0) C(-1.635,0)
  silkscreen extent -1.35,-0.8 1.35,0.8, body extent -1.84,-0.8 1.84,0.8, height 1.35
"SOD-123F - duplicate" [mm] "SMF3.3"
  rect 1.3x1.4 smd mask+0.064: 1(-1.45,0) 2(1.45,0)
  silkscreen extent -1.55,-1 1.55,1, body extent -1.93,-0.86 1.92,0.84, height 1.42
SOIC127P599X175-8N/ [mm]
  rrect25% 1.97x0.6 smd paste+0 mask+0.102: 1(-2.47,1.905) 2(-2.47,0.635) 3(-2.47,-0.635) 4(-2.47,-1.905) 5(2.47,-1.905) 6(2.47,-0.635) 7(2.47,0.635) 8(2.47,1.905)
  silkscreen extent -4.14,-2.52 1.95,2.52, body extent -3,-2.45 3,2.45, height 1.75
SOIC127P600X175-14N [mm]
  rect 1.525x0.65 smd: 1(-2.712,3.81) 2(-2.712,2.54) 3(-2.712,1.27) 4(-2.712,0) 5(-2.712,-1.27) 6(-2.712,-2.54) 7(-2.712,-3.81) 8(2.712,-3.81) 9(2.712,-2.54) 10(2.712,-1.27) 11(2.712,0) 12(2.712,1.27) 13(2.712,2.54) 14(2.712,3.81)
  silkscreen extent -3.47,-4.33 1.6,4.48, body extent -3.01,-4.33 3.01,4.33, height 1.75
SOP65P640X120-29N [mm]
  rect 1.475x0.45 smd: 1(-2.927,4.193) 2(-2.927,3.543) 3(-2.927,2.893) 4(-2.927,2.243) 5(-2.927,1.593) 6(-2.927,0.943) 7(-2.927,0.293) 8(-2.927,-0.357) 9(-2.927,-1.007) 10(-2.927,-1.657) 11(-2.927,-2.307) 12(-2.927,-2.957) 13(-2.927,-3.607) 14(-2.927,-4.257) 15(2.949,-4.257) 16(2.949,-3.607) 17(2.949,-2.957) 18(2.949,-2.307) 19(2.949,-1.657) 20(2.949,-1.007) 21(2.949,-0.357) 22(2.949,0.293) 23(2.949,0.943) 24(2.949,1.593) 25(2.949,2.243) 26(2.949,2.893) 27(2.949,3.543) 28(2.949,4.193)
  rect 3.1x5.18 smd: 29(0.011,-0.032)
  silkscreen extent -3.66,4.77 -2.19,4.77, body extent -3.2,-4.85 3.2,4.85, height 1.13
SOT23_3-DIODE [mm]
  rect 1.15x0.65 smd: 1(-1.275,0.95) 2(-1.275,-0.95) 3(1.275,0)
  silkscreen extent -0.3,-1.5 0.7,1.5, body extent -1.25,-1.5 1.25,1.5, height 1.1
SOT95P280X145-6N/ [mm]
  rect 1.2x0.6 smd: 1(-1.25,0.95) 2(-1.25,0) 3(-1.25,-0.95) 4(1.25,-0.95) 5(1.25,0) 6(1.25,0.95)
  silkscreen extent -1.85,-1.45 0.3,1.6, body extent -1.4,-1.45 1.4,1.45, height 1.45
SOT95P280X145-6N/LM74700QDBVRQ1 [mm]
  rrect25% 1.21x0.58 smd: 1(-1.255,0.95) 2(-1.255,0) 3(-1.255,-0.95) 4(1.255,-0.95) 5(1.255,0) 6(1.255,0.95)
  silkscreen extent -2.6,-1.56 0.8,1.56, body extent -1.4,-1.45 1.4,1.45, height 1.45
SOT-223-4_L6.5-W3.5-P2.30-LS7.0-BR [mm]
  rect 2.469x0.98 smd: 1(2.835,-2.3) 2(2.835,0.001) 3(2.835,2.3)
  rect 2.469x3.599 smd: 4(-2.835,0.001)
  silkscreen extent -1.37,-3.33 1.37,3.33, body extent -3.65,-3.28 3.72,3.22, height 2
sw_300SP1J1BLKM2RE_ [mm]
  rect 2.775x2.775 / inner round 2.775 / far side rect 2.775x2.775 hole 1.85 mask+0.102: 1(-4.7,0)
  round 2.775 hole 1.85 mask+0.102: 2(0,0) 3(4.7,0)
  silkscreen extent -9.3,-4.63 8.45,4.63, body extent -8.27,-4.67 8.14,4.6, height 23.1
TDK_ACT45B-510-2P-TL003_0 [mm]
  rect 1.35x0.9 smd paste+0 mask+0: 1(-2.275,1.25) 2(-2.275,-1.25) 3(2.275,-1.25) 4(2.275,1.25)
  silkscreen extent -2.41,-1.6 2.25,2.54, body extent -2.25,-1.6 2.25,1.6, height 3.01
"THD 1x2p. male straight" [mm]
  rect 1.6x1.6 hole 1.1: 1(0,0)
  round 1.6 hole 1.1: 2(2.54,0)
  silkscreen extent -1.27,-2.29 3.81,1.27, body extent -1.25,-1.27 3.78,1.22
WE-LQS_6045 [mm]
  rect 1.8x5.7 smd paste+0 mask+0.102: 1(2.3,0) 2(-2.3,0)
  silkscreen extent -1.1,-3.1 4.2,3.1, body extent -3,-3 3,3, height 4.5
XTAL_ECS-80-8-30Q-VS-TR [mm]
  rect 1.9x2.4 smd: 1(-2.05,0) 2(2.05,0)
  silkscreen extent -4.14,-1.6 2.5,1.6, body extent -2.5,-1.6 2.5,1.6, height 1.1